# EAGLE board uo_C_SE_Assembly_Template (EAGLE 9.6.2)
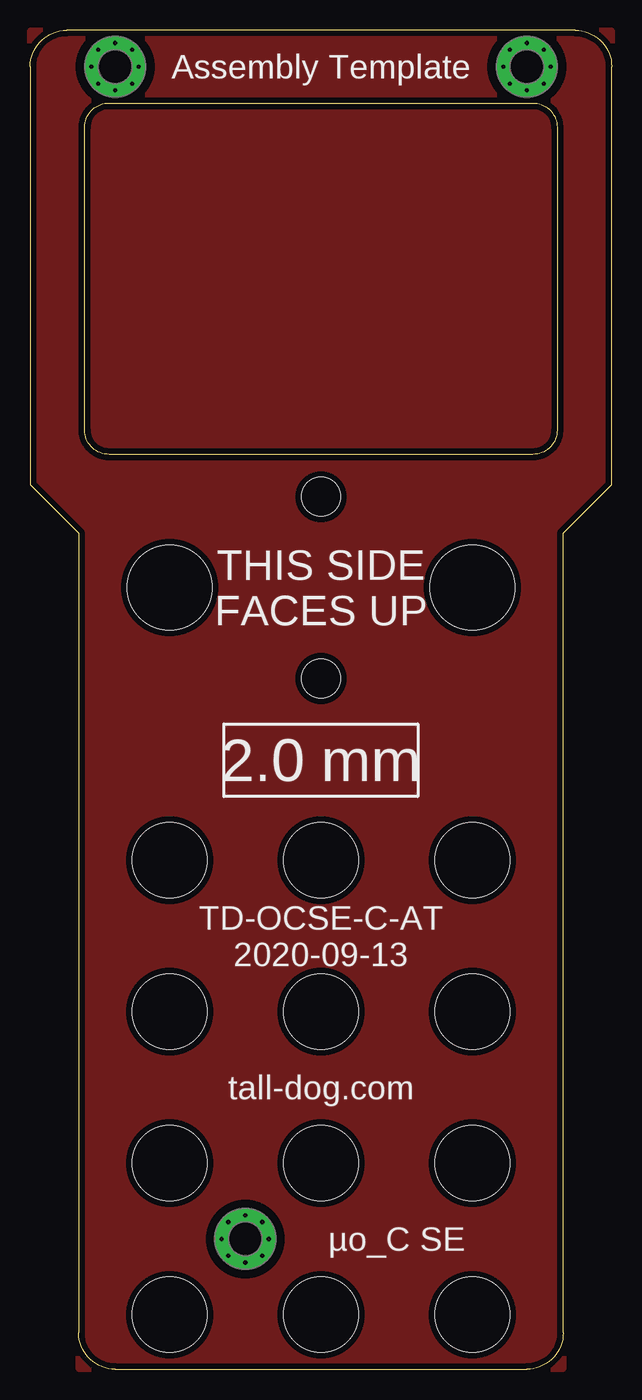
[diagram p0: board, top side]
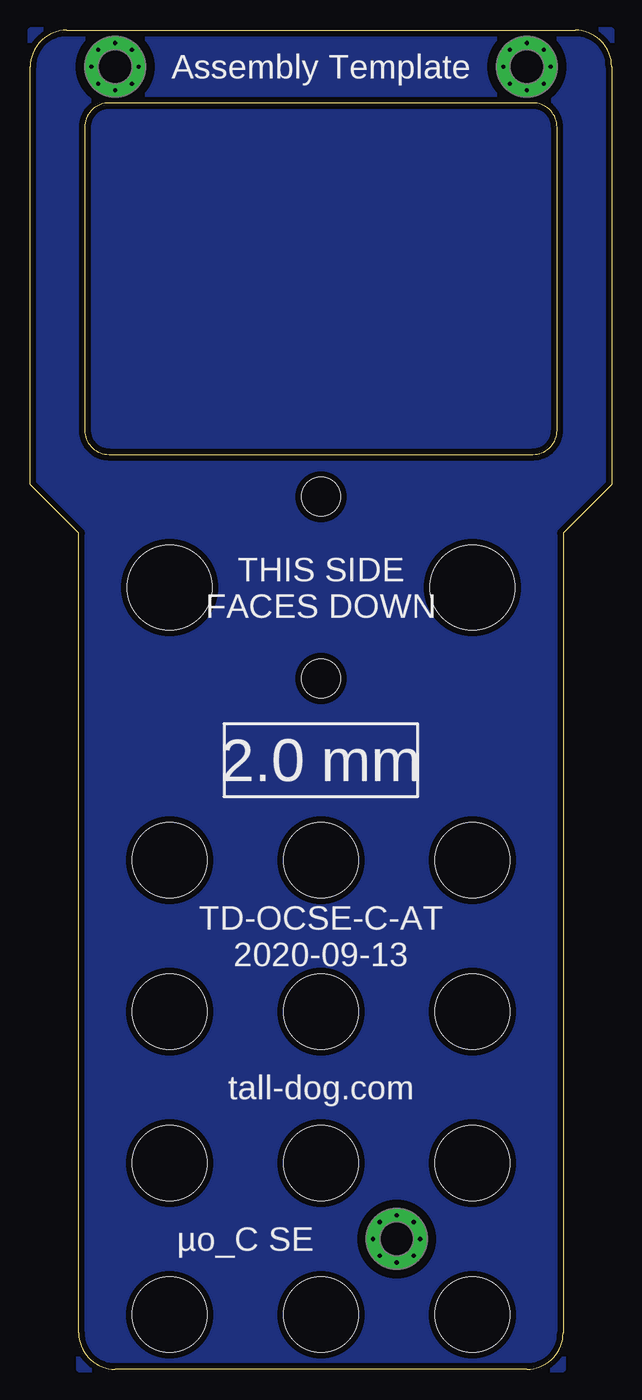
[diagram p1: board, bottom side, seen from below]

Size 48 x 110.5 mm. Coordinates in mm from the lower left corner, seen from the top.
Outline: 7,0 41,0 arc90 44,3 44,69 48,73 48,107.5 arc90 45,110.5 3,110.5 arc90 0,107.5 0,73 4,69 4,3 arc90 7,0
Outline: 6.5,104.5 41.5,104.5 arc-90 43.5,102.5 43.5,77.5 arc-90 41.5,75.5 6.5,75.5 arc-90 4.5,77.5 4.5,102.5 arc-90 6.5,104.5
Copper layers (1*16): Top 0.035mm / dielectric 1.5mm / Bottom 0.035mm
Design rules "default *": minimum track width 0.25mm, minimum drill 0.25mm, track to track 6mil, track to pad 6mil, pad to pad 6mil, via to via 6mil, smd to smd 0mil, copper to edge 13mil, drill to drill 8mil, minimum pad ring 6mil, minimum via ring 6mil, stop-mask expansion 0mil, vias tented up to drill 0.35mm, thermal gap 10mil
Holes 7 mm at 11.5,64.5 36.5,64.5
Holes 3.2 mm at 24,72 24,57
Holes 6.2 mm at 11.5,42 24,42 36.5,42 24,29.5 11.5,29.5 36.5,29.5 36.5,17 24,17 11.5,17 11.5,4.5 24,4.5 36.5,4.5

## Footprints (pad centres in the part's own frame; a part is rotated, then mirrored left to right if it is on the bottom)
M2.5-HOLE = drill 2.75 pad 5: P$1 0,0 | drill 0.35: P$2 0,1.95; P$3 0,-1.95; P$4 -1.95,0; P$5 1.95,0; P$6 1.4,1.4; P$7 -1.4,1.4; P$8 -1.4,-1.4; P$9 1.4,-1.4

## Placement (x,y rotation side)
E$1  [M2.5-HOLE]  7,107.5 0 top
E$2  [M2.5-HOLE]  41,107.5 0 top
E$3  [M2.5-HOLE]  17.75,10.75 0 top

## Library data of the parts
E$1-E$3 = uo_C_SE_Library

## Tracks (layer width: path | path; a pad name or v marks a point on that pad's centre or on a via)
GND
  pour Top (isolate 0.5): 0,110.5 48,110.5 48,100.5 48,73 44,69 44,0 4,0 4,69 0,73
  pour Bottom (isolate 0.5): 0,110.5 48,110.5 48,100.5 48,73 44,69 44,0 4,0 4,69 0,73

## Text on the board
tPlace: Assembly Template | THIS SIDE / FACES UP | 2.0 mm | TD-OCSE-C-AT / 2020-09-13 | tall-dog.com | µo_C SE
bPlace: Assembly Template | THIS SIDE / FACES DOWN | 2.0 mm | TD-OCSE-C-AT / 2020-09-13 | tall-dog.com | µo_C SE